# Altium PCB PCB1.PcbDoc (part 1 of 2)
Units mm, origin at the board's own origin, x right, y up, seen from the top; angles counter-clockwise.
Board outline 53.34 x 94.59 mm, 4 copper layers (Top Layer, Signal Layer 1, Signal Layer 2, Bottom Layer), stack 0.778 mm thick; 130 components, 127 nets, 591 pads, 299 vias.
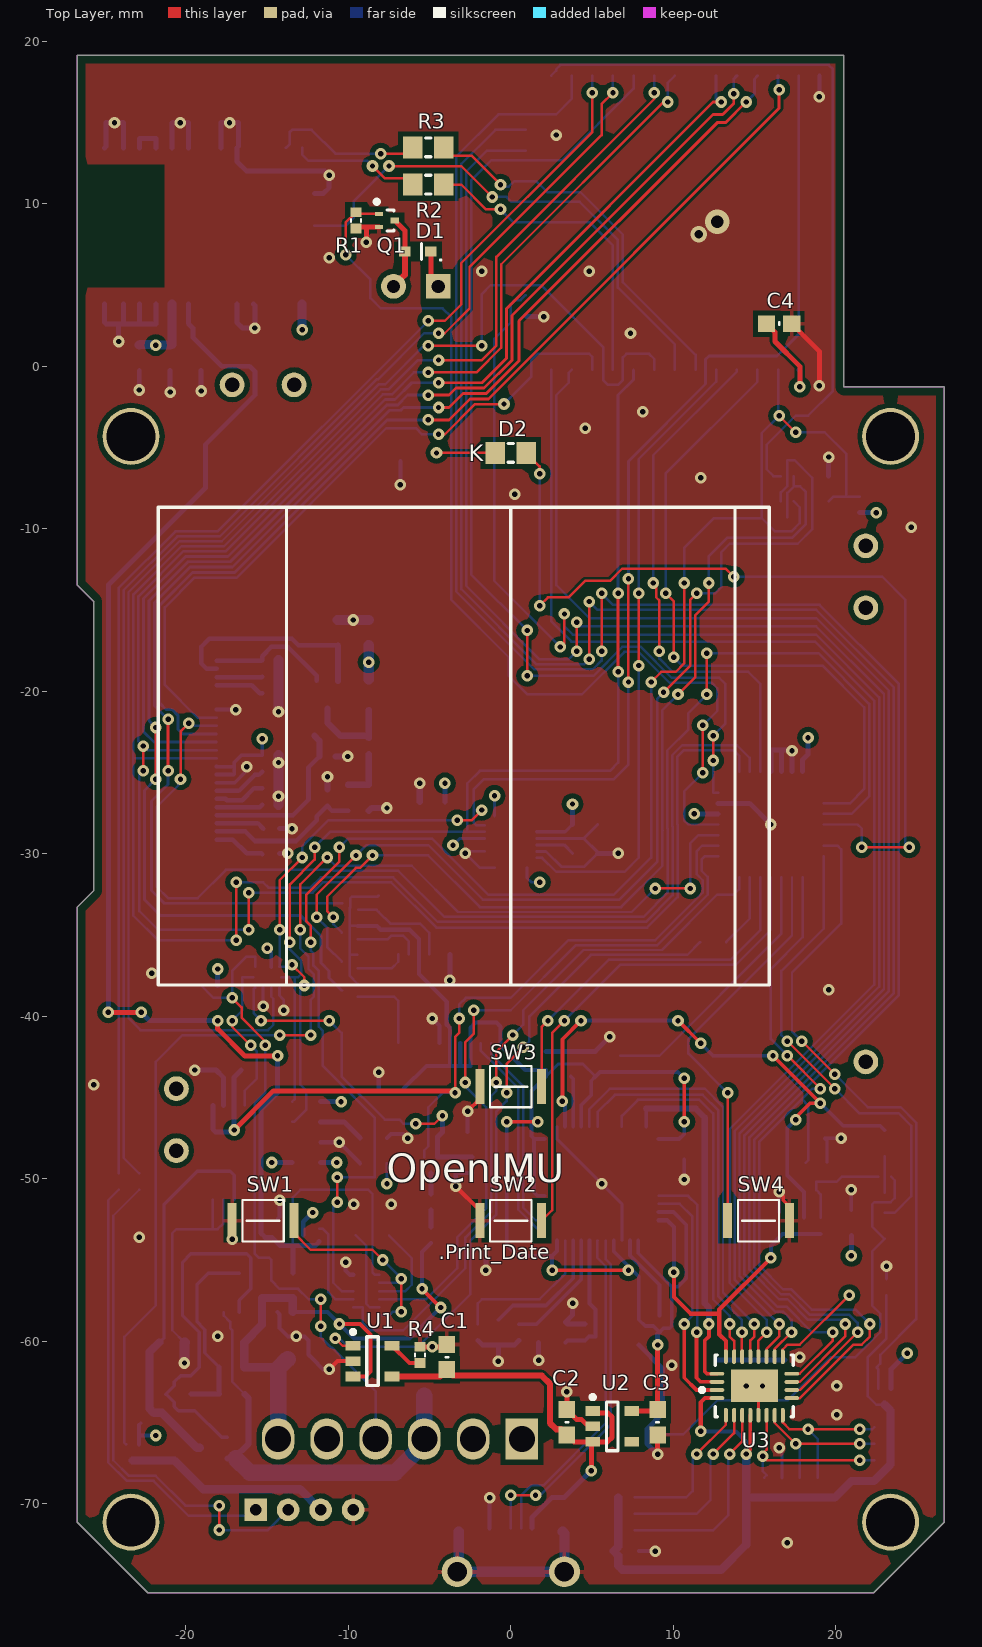
[diagram p0: Top Layer view]
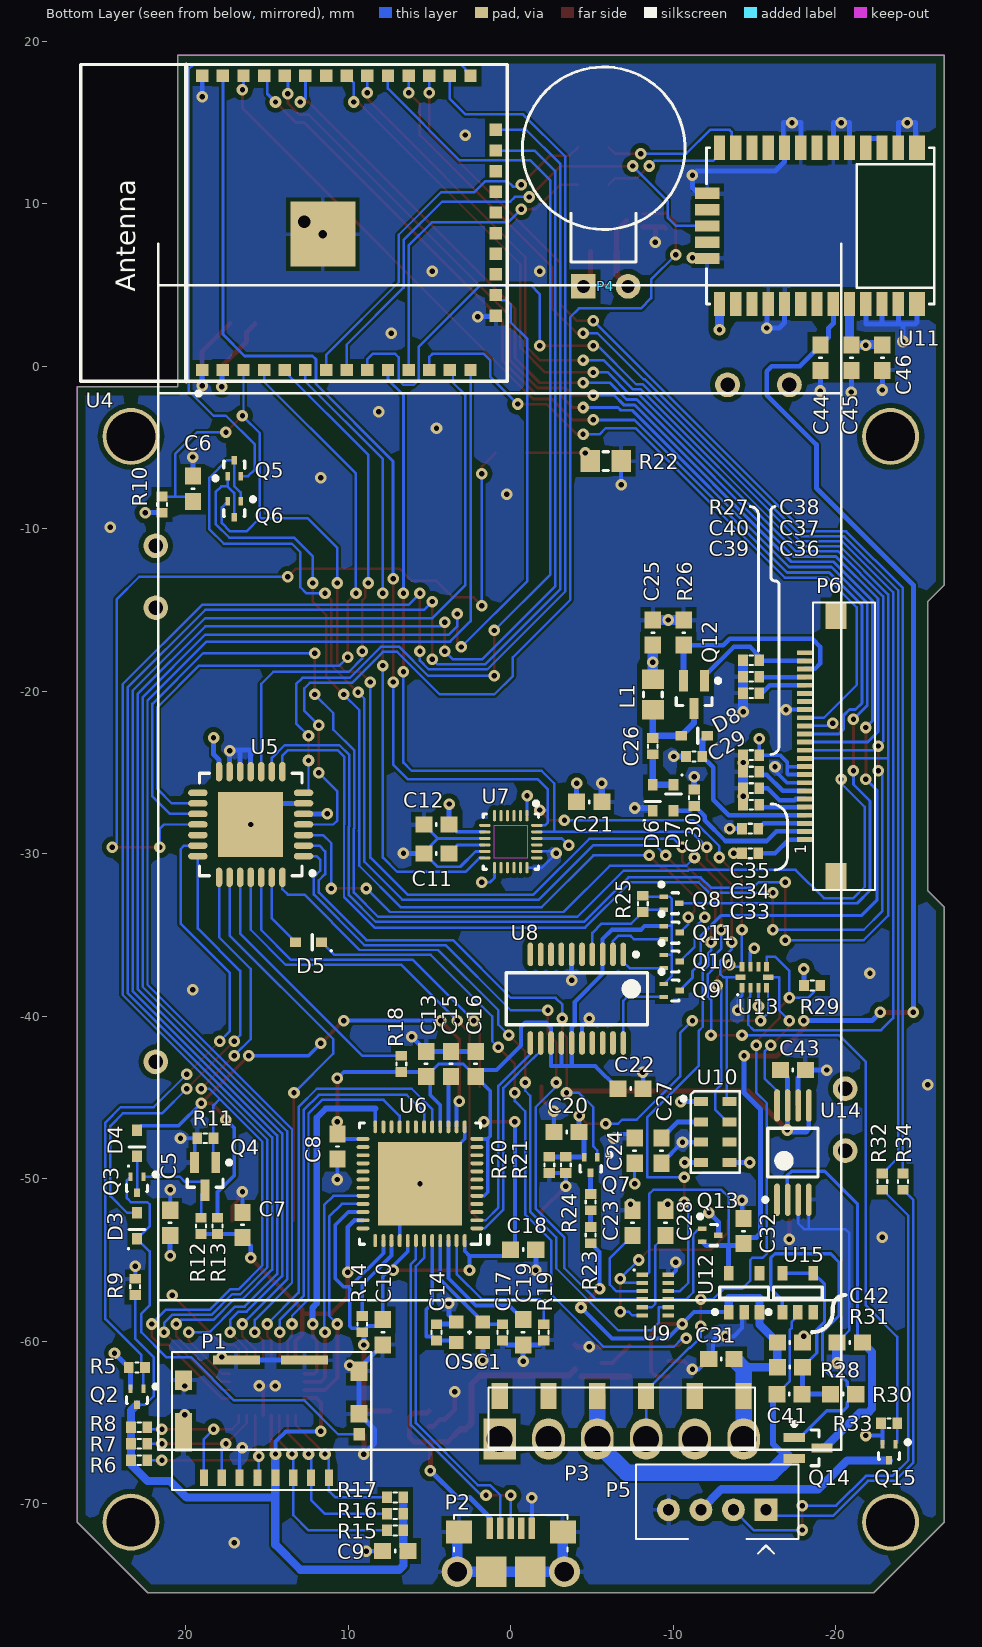
[diagram p1: Bottom Layer view, seen from below]
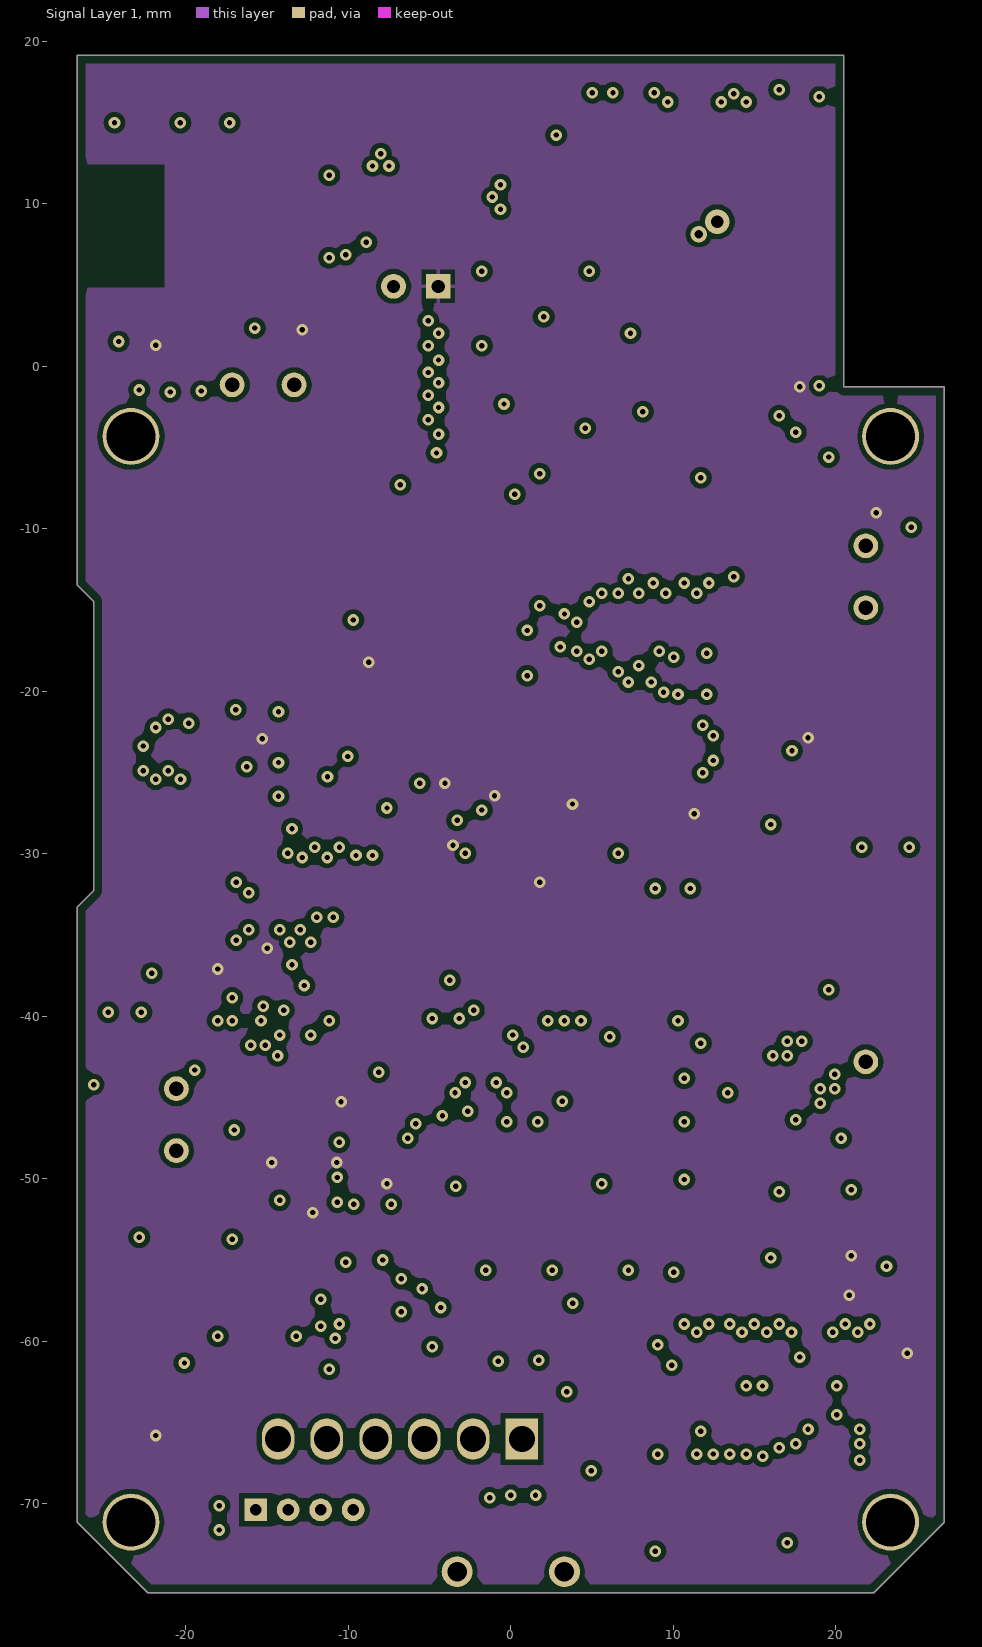
[diagram p2: Signal Layer 1]
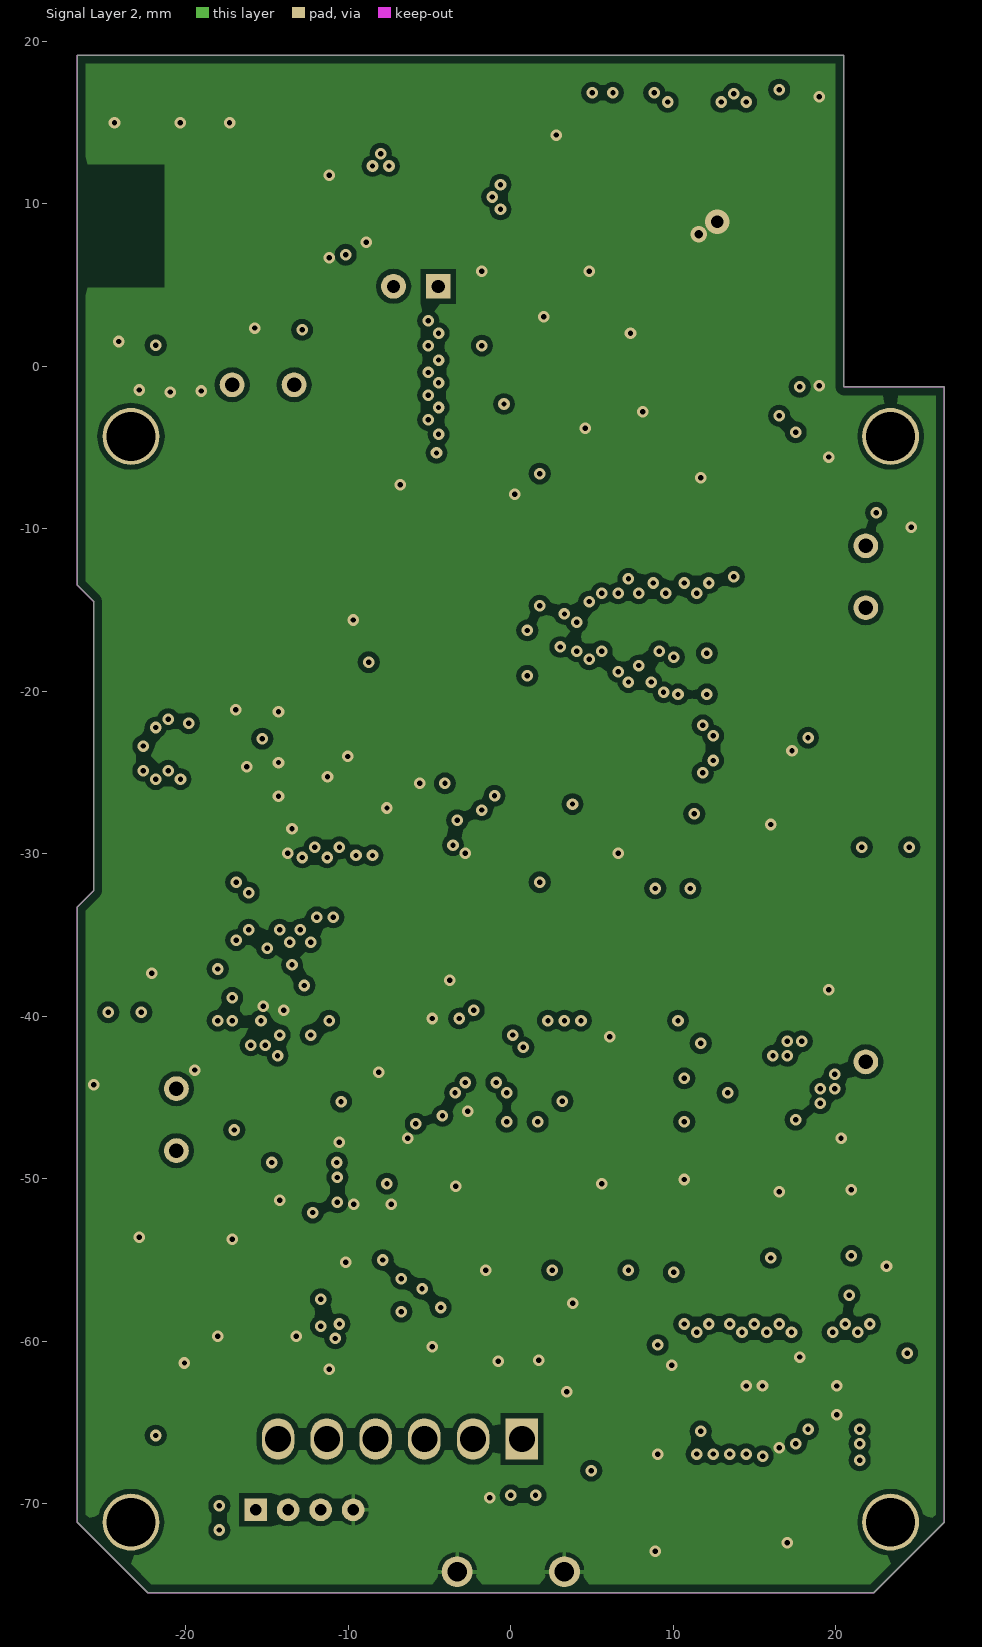
[diagram p3: Signal Layer 2]

## Layer stack, top to bottom
Top Solder: solder mask 0.0102, Solder Resist, Dk 3.5
Top Layer: signal copper 0.0356
Dielectric 1: core 0.254, FR-4, Dk 4.2
Signal Layer 1: signal copper 0.036
Dielectric 3: prepreg 0.127, Dk 4.2
Signal Layer 2: signal copper 0.036
Dielectric 2: core 0.254, Dk 4.2
Bottom Layer: signal copper 0.0356
Bottom Solder: solder mask 0.0102, Solder Resist, Dk 3.5

## Board outline
-26.67,-71.12 -26.67,-33.274 -25.654,-32.258 -25.654,-14.478 -26.67,-13.462 -26.67,19.13 20.494,19.13 20.494,-1.27 26.67,-1.27 26.67,-71.12 22.332,-75.458 -22.332,-75.458

## Design rules (kind name [scope] priority, off if disabled: settings)
Clearance Clearance_1 [InPoly vs OnLayer('Keep-Out Layer')] p1: gap=0.508
Clearance [All] p2: gap=0.152 except(0.305: SMDPad-Poly THPad-Poly Via-Poly Poly-Poly)
PolygonConnect PolygonConnect_1 [IsVia] p1: connectstyle=Direct reliefconductorwidth=0.254 reliefentries=4 polygonreliefangle="90 Angle" airgapwidth=0.254
PolygonConnect [All] p2: connectstyle=Relief reliefconductorwidth=0.254 reliefentries=4 polygonreliefangle="90 Angle" airgapwidth=0.254
RoomDefinition TopLevel [InComponentClass('TopLevel')] p1: confinementstyle=ConfineIn formatcopy=TRUE lockcomponents=FALSE outline 27.795,-78.525 31.195,-78.525 31.195,-74.525 27.795,-74.525
RoomDefinition USB_SD [InComponentClass('USB_SD')] p2: confinementstyle=ConfineIn formatcopy=TRUE lockcomponents=FALSE outline 117.438,31.528 269.076,31.528 269.076,45.117 117.438,45.117
RoomDefinition Sensors [InComponentClass('Sensors')] p3: confinementstyle=ConfineIn formatcopy=TRUE lockcomponents=FALSE outline 117.438,11.462 309.97,11.462 309.97,30.258 117.438,30.258
RoomDefinition SD_Share [InComponentClass('SD_Share')] p4: confinementstyle=ConfineIn formatcopy=TRUE lockcomponents=FALSE outline 117.438,-9.112 249.391,-9.112 249.391,10.192 117.438,10.192
RoomDefinition Power [InComponentClass('Power')] p5: confinementstyle=ConfineIn formatcopy=TRUE lockcomponents=FALSE outline 117.438,-30.321 298.032,-30.321 298.032,-10.255 117.438,-10.255
RoomDefinition MCU [InComponentClass('MCU')] p6: confinementstyle=ConfineIn formatcopy=TRUE lockcomponents=FALSE outline 117.438,-58.515 266.028,-58.515 266.028,-29.051 117.438,-29.051
RoomDefinition Display [InComponentClass('Display')] p7: confinementstyle=ConfineIn formatcopy=TRUE lockcomponents=FALSE outline 117.438,-80.232 213.704,-80.232 213.704,-59.658 117.438,-59.658
RoomDefinition ADC [InComponentClass('ADC')] p8: confinementstyle=ConfineIn formatcopy=TRUE lockcomponents=FALSE outline 117.438,-86.328 139.79,-86.328 139.79,-78.962 117.438,-78.962
RoutingVias [All] p1: holewidth=0.33 width=0.711 viastyle="Through Hole" minholewidth=0.33 minwidth=0.711 maxholewidth=0.711 maxwidth=1.27
SolderMaskExpansion [All] p1: expansion=0.102
Width [All] p1: maxlimit=1.27 minlimit=0.152 preferedwidth=0.254 midlayer1_maxwidth=0.254 midlayer2_maxwidth=0.254 minimp=50.000000 maximp=50.000000 favimp=50.000000
30 further rules are at their usual default settings.

## Classes and differential pairs
component class TopLevel: R18
component class ADC: U13
component class Display: C25 C26 C29 C30 C33 C34 C35 C36 C37 C38 C39 C40 D6 D7 D8 L1 P6 Q12 R26 R27
component class MCU: C4 C6 C22 Q5 Q6 Q8 Q9 Q10 Q11 R10 R25 U4 U5 U8
component class Power: C1 C20 C23 C28 C31 C32 C41 C42 C43 D5 P3 Q7 Q13 Q14 R4 R20 R21 R23 R24 R28 R29 R30 R31 SW1 U1 U9 U12 U14 U15
component class SD_Share: C5 C7 C9 D3 D4 P1 Q2 Q3 Q4 R5 R6 R7 R8 R9 R11 R12 R13 R15 R16 R17 U3
component class Sensors: C11 C12 C21 C24 C27 C44 C45 C46 D1 D2 P4 P5 Q1 Q15 R1 R2 R3 R22 R32 R33 R34 SW2 SW3 SW4 U7 U10 U11
component class USB_SD: C2 C3 C8 C10 C13 C14 C15 C16 C17 C18 C19 OSC1 P2 R14 R19 U2 U6

## Components (designator, comment, footprint, x,y, rotation, side; value= is the part's Value field where it differs from the comment)
C1 "Capacitor" 0603 -3.937,-60.96 r270 top (schematic designator C26)
C2 "Capacitor" 0603 3.448,-64.97 r90 top (schematic designator C38)
C3 "Capacitor" 0603 9.036,-64.97 r270 top (schematic designator C39)
C4 "Capacitor" 0603 16.51,2.62 r180 top (schematic designator C17)
C5 "Capacitor" 0603 20.955,-52.705 r90 bottom (schematic designator C30)
C6 "Capacitor" 0603 19.558,-7.54 r90 bottom (schematic designator C18)
C7 "Capacitor" 0603 16.51,-52.832 r90 bottom (schematic designator C28)
C8 "Capacitor" 0603 10.668,-48.006 r270 bottom (schematic designator C43)
C9 "Capacitor" 0603 7.112,-72.898 r0 bottom (schematic designator C29)
C10 "Capacitor" 0603 7.874,-59.436 r270 bottom (schematic designator C41)
C11 "Capacitor" 0603 4.572,-29.972 r0 bottom (schematic designator C31)
C12 "Capacitor" 0603 4.572,-28.194 r0 bottom (schematic designator C32)
C13 "Capacitor" 0603 5.207,-42.926 r90 bottom (schematic designator C48)
C14 "Capacitor" 0402 4.572,-59.436 r90 bottom (schematic designator C40)
C15 "Capacitor" 0603 3.683,-42.926 r90 bottom (schematic designator C46)
C16 "Capacitor" 0603 2.159,-42.926 r90 bottom (schematic designator C44)
C17 "Capacitor" 0402 0.508,-59.436 r90 bottom (schematic designator C45)
C18 "Capacitor" 0603 -0.762,-54.356 r180 bottom (schematic designator C42)
C19 "Capacitor" 0603 -0.762,-59.436 r270 bottom (schematic designator C47)
C20 "Capacitor" 0603 -3.429,-47.117 r180 bottom (schematic designator C23)
C21 "Capacitor" 0603 -4.826,-26.797 r180 bottom (schematic designator C33)
C22 "Capacitor" 0603 -7.366,-44.45 r0 bottom (schematic designator C16)
C23 "Capacitor" 0603 -7.493,-52.705 r270 bottom (schematic designator C2)
C24 "Capacitor" 0603 -7.62,-48.26 r90 bottom (schematic designator C34)
C25 "Capacitor" 0603 -8.737,-16.389 r270 bottom (schematic designator C14)
C26 "Capacitor" 0402 -8.737,-23.374 r270 bottom (schematic designator C4)
C27 "Capacitor" 0603 -9.271,-48.26 r270 bottom (schematic designator C1)
C28 "Capacitor" 0603 -9.525,-52.705 r270 bottom (schematic designator C50)
C29 "Capacitor" 0402 -11.277,-24.009 r180 bottom (schematic designator C10)
C30 "Capacitor" 0402 -11.277,-26.549 r270 bottom (schematic designator C12)
C31 "Capacitor" 0603 -12.954,-61.087 r180 bottom (schematic designator C27)
C32 "Capacitor" 0603 -14.31,-53.208 r270 bottom (schematic designator C25)
C33 "Capacitor" 0402 -14.732,-29.972 r180 bottom (schematic designator C13)
C34 "Capacitor" 0402 -14.732,-28.448 r180 bottom (schematic designator C11)
C35 "Capacitor" 0402 -14.792,-26.974 r180 bottom (schematic designator C9)
C36 "Capacitor" 0402 -14.792,-25.958 r180 bottom (schematic designator C8)
C37 "Capacitor" 0402 -14.792,-24.942 r180 bottom (schematic designator C7)
C38 "Capacitor" 0402 -14.792,-23.926 r180 bottom (schematic designator C49)
C39 "Capacitor" 0402 -14.792,-20.116 r180 bottom (schematic designator C6)
C40 "Capacitor" 0402 -14.792,-19.1 r180 bottom (schematic designator C5)
C41 "Capacitor" 0603 -17.145,-63.246 r180 bottom (schematic designator C21)
C42 "Capacitor" 0603 -17.173,-60.06 r0 bottom (schematic designator C24)
C43 "Capacitor" 0603 -17.358,-43.302 r0 bottom (schematic designator C22)
C44 "Capacitor" 0603 -19.05,0.525 r270 bottom (schematic designator C37)
C45 "Capacitor" 0603 -20.955,0.525 r270 bottom (schematic designator C35)
C46 "Capacitor" 0603 -22.86,0.525 r270 bottom (schematic designator C36)
D1 "Diode" DIODE_SOD523 -5.715,7.065 r180 top (schematic designator D9)
D2 "Diode_LED" 0805_LED 0,-5.334 r0 top (schematic designator D8)
D3 "Diode" DIODE_SOD523 22.995,-52.892 r90 bottom (schematic designator D6)
D4 "Diode" DIODE_SOD523 22.995,-47.812 r90 bottom (schematic designator D5)
D5 "Diode" DIODE_SOD523 12.446,-35.433 r0 bottom (schematic designator D10)
D6 "Diode" DIODE_SOD523 -8.737,-26.549 r90 bottom (schematic designator D2)
D7 "Diode" DIODE_SOD523 -10.007,-26.549 r270 bottom (schematic designator D1)
D8 "Diode" DIODE_SOD523 -11.277,-22.739 r0 bottom (schematic designator D3)
L1 "Inductor" 0805 -8.737,-20.199 r270 bottom
OSC1 "Crystal_4" XTAL_ABM10 2.54,-59.436 r0 bottom (schematic designator OSC2)
P1 "CON_uSD_1051620001" CONN_uSD_MOLEX_1051620001 14.732,-64.77 r180 bottom (schematic designator P4)
P2 "USB_MICROB" USB_MICROB 0,-74.168 r180 bottom (schematic designator P6)
P3 "CON6_FBIS2" CONN6_FBIS2_V -6.82,-64.68 r180 bottom locked (schematic designator P2)
P4 "MOTOR_VIBRATION_316040004" MOTOR_VIBRATION_316040004 -5.715,13.415 r180 bottom (schematic designator P7)
P5 "CON4" CONN_JSTPH_4_TH_RA -12.7,-70.358 r180 bottom
P6 "CON24_ALT" CONN24_FFC_687124183622 -18.602,-23.374 r90 bottom (schematic designator P1)
Q1 "MOSFET_N_GDS" SOT723 -7.62,8.97 r0 top (schematic designator Q19)
Q2 "MOSFET_P_GDS" SOT723 23,-63.4 r270 bottom (schematic designator Q14)
Q3 "MOSFET_N_GDS" SOT723 22.995,-50.352 r270 bottom (schematic designator Q15)
Q4 "MOSFET_N_GDS" SC70_GDS 18.804,-49.844 r270 bottom (schematic designator Q16)
Q5 "MOSFET_N_GDS" SOT723 17.018,-6.27 r90 bottom
Q6 "MOSFET_N_GDS" SOT723 17.018,-8.81 r270 bottom (schematic designator Q2)
Q7 "MOSFET_N_GDS" SOT723 -4.912,-49.144 r270 bottom (schematic designator Q8)
Q8 "MOSFET_N_GDS" SOT723 -9.888,-33.039 r180 bottom (schematic designator Q4)
Q9 "MOSFET_N_GDS" SOT723 -9.906,-38.405 r180 bottom (schematic designator Q3)
Q10 "MOSFET_N_GDS" SOT723 -9.906,-36.627 r180 bottom (schematic designator Q7)
Q11 "MOSFET_N_GDS" SOT723 -9.906,-34.849 r180 bottom (schematic designator Q6)
Q12 "MOSFET_N_GDS" SC70_GDS -11.277,-20.199 r270 bottom (schematic designator Q1)
Q13 "MOSFET_P_GDS" SOT723 -12.278,-53.462 r180 bottom (schematic designator Q10)
Q14 "MOSFET_N_GDS" SC70_GDS -18.288,-66.548 r180 bottom (schematic designator Q9)
Q15 "MOSFET_P_GDS" SOT723 -23.271,-66.828 r270 bottom (schematic designator Q18)
R1 "Resistor" 0402 -9.525,8.97 r270 top (schematic designator R51)
R2 "Resistor" 0805 -5.08,11.176 r180 top (schematic designator R37)
R3 "Resistor" 0805 -5.08,13.462 r180 top (schematic designator R38)
R4 "Resistor" 0402 -5.588,-60.833 r90 top (schematic designator R21)
R5 "Resistor" 0402 23,-61.6 r180 bottom (schematic designator R30)
R6 "Resistor" 0402 22.86,-67.31 r180 bottom (schematic designator R25)
R7 "Resistor" 0402 22.86,-66.294 r180 bottom (schematic designator R26)
R8 "Resistor" 0402 22.86,-65.278 r180 bottom (schematic designator R27)
R9 "Resistor" 0402 23.114,-56.642 r270 bottom (schematic designator R22)
R10 "Resistor" 0402 21.463,-8.509 r90 bottom (schematic designator R7)
R11 "Resistor" 0402 18.796,-47.498 r180 bottom (schematic designator R23)
R12 "Resistor" 0402 19.058,-52.892 r90 bottom (schematic designator R31)
R13 "Resistor" 0402 18.042,-52.892 r90 bottom (schematic designator R32)
R14 "Resistor" 0402 9.144,-58.928 r90 bottom (schematic designator R47)
R15 "Resistor" 0402 7.112,-71.628 r0 bottom (schematic designator R24)
R16 "Resistor" 0402 7.112,-70.612 r0 bottom (schematic designator R29)
R17 "Resistor" 0402 7.112,-69.596 r0 bottom (schematic designator R28)
R18 "Resistor" 0402 6.731,-42.926 r270 bottom (schematic designator R2)
R19 "Resistor" 0402 -2.032,-59.436 r270 bottom (schematic designator R49)
R20 "Resistor" 0402 -2.372,-49.144 r90 bottom (schematic designator R14)
R21 "Resistor" 0402 -3.388,-49.144 r90 bottom (schematic designator R15)
R22 "Resistor" 0805 -5.842,-5.842 r0 bottom (schematic designator R34)
R23 "Resistor" 0402 -4.912,-53.454 r270 bottom (schematic designator R11)
R24 "Resistor" 0402 -4.912,-51.422 r270 bottom (schematic designator R12)
R25 "Resistor" 0402 -8.128,-33.071 r270 bottom (schematic designator R8)
R26 "Resistor" 0603 -10.642,-16.389 r90 bottom (schematic designator R4)
R27 "Resistor" 0402 -14.792,-18.084 r0 bottom (schematic designator R3)
R28 "Resistor" 0603 -17.173,-61.584 r180 bottom (schematic designator R9)
R29 "Resistor" 0402 -18.542,-38.1 r0 bottom (schematic designator R13)
R30 "Resistor" 0603 -20.447,-63.246 r180 bottom (schematic designator R10)
R31 "Resistor" 0603 -20.854,-60.06 r0 bottom (schematic designator R16)
R32 "Resistor" 0402 -22.86,-50.165 r90 bottom (schematic designator R53)
R33 "Resistor" 0402 -23.271,-65.028 r0 bottom (schematic designator R35)
R34 "Resistor" 0402 -24.13,-50.165 r90 bottom (schematic designator R39)
SW1 "Button_2pins" BUTTON_EVP-AW -15.24,-52.57 r0 top
SW2 "Button_2pins" BUTTON_EVP-AW 0,-52.57 r180 top (schematic designator SW3)
SW3 "Button_2pins" BUTTON_EVP-AW 0,-44.323 r180 top (schematic designator SW4)
SW4 "Button_2pins" BUTTON_EVP-AW 15.24,-52.57 r0 top (schematic designator SW2)
U1 "MCP73831T-2ACI/OT" SOT23_5 -8.509,-61.214 r0 top (schematic designator U8)
U2 "AP2112K-3.3TRG1" SOT23_5 6.242,-65.224 r0 top (schematic designator U14)
U3 "FSSD07BQX" MLP24 14.986,-62.738 r90 top (schematic designator U9)
U4 "ESP-WROOM-32" ESP-WROOM-32 13.716,8.822 r90 bottom (schematic designator U3)
U5 "MCP23S17-E/ML" QFN28-S 16.002,-28.194 r0 bottom (schematic designator U2)
U6 "USB2640-HZH-02" QFN48 5.588,-50.292 r180 bottom (schematic designator U15)
U7 "MPU-9250" QFN24-0.4mm-NOPAD 0,-29.25 r270 bottom locked (schematic designator U10)
U8 "FT231XS-R" SSOP20 -4.064,-38.913 r270 bottom (schematic designator U4)
U9 "STM6600DA55DM6F" DFN12-0.5mm -8.89,-57.15 r180 bottom (schematic designator U16)
U10 "MPL115A2T1" MPL115A2T1 -12.573,-47.117 r180 bottom (schematic designator U11)
U11 "CAM-M8Q" CAM-M8 -18.542,8.632 r270 bottom (schematic designator U12)
U12 "AP2112K-3.3TRG1" SOT23_5 -14.358,-56.996 r90 bottom (schematic designator U7)
U13 "ADS1015IRUGR" ADS1018IRUGR -14.986,-37.592 r90 bottom (schematic designator U1)
U14 "INA240" TSSOP8 -17.358,-48.382 r90 bottom (schematic designator U6)
U15 "MIC2774N-29YM5-TR" SOT23_5 -17.66,-56.996 r90 bottom (schematic designator U5)

## Footprints (in the part's own frame and the unit in brackets; to place one, negate y for a bottom-side part, rotate by r counter-clockwise, add the part's x,y. Pads: shape width x height; smd on the part's side, far side on the other; paste and mask are expansions set on the pad)
0402 [mm] "Chip Resistor, 2-Leads, Body 1,0x0,5mm, IPC Medium Density"
  rect 0.6x0.7 smd mask+0.04: 1(-0.5,0) 2(0.5,0)
  silkscreen extent -0.1,-0.3 0.1,0.3, body extent -0.55,-0.27 0.55,0.28, height 0.4
0603 [mm] "Chip Resistor, 2-Leads, Body 1,5x0,8mm, IPC Medium Density"
  rect 1.05x1 smd: 1(-0.775,0) 2(0.775,0)
  silkscreen extent 0,-0.08 0,0.08, body extent -0.85,-0.48 0.85,0.47, height 0.55
0805 [mm] "Chip Resistor, 2-Leads, Body 2,0x1,3mm, IPC Medium Density"
  rect 1.2x1.35 smd: 1(-0.95,0) 2(0.95,0)
  silkscreen extent -0.15,-0.58 0.15,0.58, body extent -1.1,-0.67 1.1,0.67, height 0.65
0805_LED [mm] "Chip Resistor, 2-Leads, Body 2,0x1,3mm, IPC Medium Density"
  rect 1.2x1.35 smd: A(0.95,0) K(-0.95,0)
  silkscreen extent -0.15,-0.58 0.15,0.58, body extent -1.1,-0.67 1.1,0.67, height 0.65
ADS1018IRUGR [mm] "DFN10, 4pins (height), 1pin (width), 2*1.5mm"
  rect 0.58x0.3 smd mask+0.04: 1(-0.635,0.75) 4(-0.635,-0.75) 6(0.635,-0.75) 9(0.635,0.75)
  rect 0.58x0.25 smd mask+0.04: 2(-0.635,0.25) 3(-0.635,-0.25) 7(0.635,-0.25) 8(0.635,0.25)
  rect 0.35x0.63 smd mask+0.04: 5(0,-0.86) 10(0,0.86)
  silkscreen extent -1.12,0.98 -1.03,1.07, body extent -0.77,-1.03 0.77,1.02, height 0.4
BUTTON_EVP-AW [mm] "EVP-AWBD2A SMT Vertical low height"
  rect 0.55x2.15 smd mask+0.12: 1(-1.9,0) 2(1.9,0)
  silkscreen extent -1.27,-1.27 1.27,1.27, body extent -1.75,-1.1 1.75,1.1, height 0.56
CAM-M8 [mm] "u-blox CAM GNSS antenna module"
  rect 1.5x0.7 smd: 1(4.8,-5.7) 2(4.8,-4.7) 3(4.8,-3.7) 4(4.8,-2.7) 5(4.8,-1.7) 6(4.8,-0.7) 7(4.8,0.3) 8(4.8,1.3) 9(4.8,2.3) 10(4.8,3.3) 11(4.8,4.3) 12(4.8,5.3) 15(-4.8,5.3) 16(-4.8,4.3) 17(-4.8,3.3) 18(-4.8,2.3) 19(-4.8,1.3) 20(-4.8,0.3) 21(-4.8,-0.7) 22(-4.8,-1.7) 23(-4.8,-2.7) 24(-4.8,-3.7) 25(-4.8,-4.7) 26(-4.8,-5.7)
  rect 1.5x1 smd: 13(4.8,6.45) 14(-4.8,6.45)
  rect 0.7x1.5 smd: 27(-2,-6.45) 28(-1,-6.45) 29(0,-6.45) 30(1,-6.45) 31(2,-6.45)
  Multi-Layer pour cut-out: -3.8,7.5 -3.8,2.75 3.8,2.75 3.8,7.5
  silkscreen extent -4.8,-6.5 4.8,7.5, body extent -4.8,-6.5 4.8,7.5, height 1.97
CONN6_FBIS2_V [mm] "TE 1932870-2"
  oval 2x2.54 hole 1.6 mask+0.12: 1(7.5,-1.325) 2(4.5,-1.325) 3(1.5,-1.325) 4(-1.5,-1.325) 5(-4.5,-1.325)
  rect 1x1.6 smd mask+0.12: 1(7.5,1.325) 2(4.5,1.325) 3(1.5,1.325) 4(-1.5,1.325) 5(-4.5,1.325) 6(-7.5,1.325)
  rect 2x2.54 hole 1.6 mask+0.12: 6(-7.5,-1.325)
  silkscreen extent -8.2,-1.85 8.2,1.85, body extent -8.2,-2.75 8.2,1.94, height 4.62
CONN24_FFC_687124183622 [mm] "0.5mm pitch 687124183622"
  rect 0.3x1 smd mask+0.05: 1(-5.75,0.5) 2(-5.25,0.5) 3(-4.75,0.5) 4(-4.25,0.5) 5(-3.75,0.5) 6(-3.25,0.5) 7(-2.75,0.5) 8(-2.25,0.5) 9(-1.75,0.5) 10(-1.25,0.5) 11(-0.75,0.5) 12(-0.25,0.5) 13(0.25,0.5) 14(0.75,0.5) 15(1.25,0.5) 16(1.75,0.5) 17(2.25,0.5) 18(2.75,0.5) 19(3.25,0.5) 20(3.75,0.5) 21(4.25,0.5) 22(4.75,0.5) 23(5.25,0.5) 24(5.75,0.5)
  rect 1.65x1.3 smd paste+0 mask+0.025: M(-8.025,-1.4) M(8.025,-1.4)
  silkscreen extent -8.85,-3.8 8.85,0, body extent -8.85,-3.63 8.85,0.62, height 1.28
CONN_JSTPH_4_TH_RA [mm] "Right-angle, TH JST-PH connector"
  rect 1.397x1.397 hole 0.7 mask+0.12: 1(3,0)
  round 1.397 hole 0.7 mask+0.12: 2(1,0) 3(-1,0) 4(-3,0)
  silkscreen extent -5,-2.7 5,2.8, body extent -4.95,-6.35 4.95,1.25, height 5.15
CONN_uSD_MOLEX_1051620001 [mm] "MicroSD card Molex 1051620001"
  rect 0.5x1 smd: 1(3.545,-3.618) 2(2.445,-3.618) 3(1.345,-3.618) 4(0.245,-3.618) 5(-0.855,-3.618) 6(-1.955,-3.618) 7(-3.055,-3.618) 8(-4.155,-3.618)
  rect 0.72x0.78 smd: 9(5.405,-0.937)
  rect 1.05x1.08 smd: G1(5.395,0.333)
  rect 1.05x1.2 smd: G2(5.395,2.943) G3(-5.405,2.372)
  rect 1.05x2.39 smd: G4(-5.405,-0.813)
  rect 2.91x0.55 smd: M(-2.15,3.618) M(2.04,3.618)
  silkscreen extent -6.1,-4.37 6.15,4.13, body extent -5.65,-12.12 6.14,3.66, height 1.5
DFN12-0.5mm [mm] "DFN12 0.5mm-pitch (STM6600)"
  rect 0.711x0.254 smd mask+0.02: 1(-0.8,1.25) 2(-0.8,0.75) 3(-0.8,0.25) 4(-0.8,-0.25) 5(-0.8,-0.75) 6(-0.8,-1.25) 7(0.8,-1.25) 8(0.8,-0.75) 9(0.8,-0.25) 10(0.8,0.25) 11(0.8,0.75) 12(0.8,1.25)
  silkscreen extent -1.35,1.5 -1.25,1.6, body extent -1,-1.5 1,1.5, height 0.8
DIODE_SOD523 [mm] "Per NXP footprint recommendation (reflow soldering)"
  rect 0.7x0.6 smd paste-0.05: A(0.8,0) K(-0.8,0)
  silkscreen extent -1.45,-0.48 -0.23,0.57, body extent -0.65,-0.43 0.65,0.43, height 0.77
ESP-WROOM-32 [mm] "ESP-WROOM-32 module"
  rect 0.762x0.762 smd: 1(-9.05,5.27) 2(-9.05,4) 3(-9.05,2.73) 4(-9.05,1.46) 5(-9.05,0.19) 6(-9.05,-1.08) 7(-9.05,-2.35) 8(-9.05,-3.62) 9(-9.05,-4.89) 10(-9.05,-6.16) 11(-9.05,-7.43) 12(-9.05,-8.7) 13(-9.05,-9.97) 14(-9.05,-11.24) 15(-5.71,-12.8) 16(-4.44,-12.8) 17(-3.17,-12.8) 18(-1.9,-12.8) 19(-0.63,-12.8) 20(0.64,-12.8) 21(1.91,-12.8) 22(3.18,-12.8) 23(4.45,-12.8) 24(5.72,-12.8) 25(9.05,-11.24) 26(9.05,-9.97) 27(9.05,-8.7) 28(9.05,-7.43) 29(9.05,-6.16) 30(9.05,-4.89) 31(9.05,-3.62) 32(9.05,-2.35) 33(9.05,-1.08) 34(9.05,0.19) 35(9.05,1.46) 36(9.05,2.73) 37(9.05,4) 38(9.05,5.27)
  rect 4x4 smd: PAD(-0.7,-2.15)
  silkscreen extent -10.62,-13.5 9.75,12.75, body extent -9.04,-12.75 9.03,12.79, height 3
MLP24 [mm] "0.5mm pitch; for FSSD07"
  oval 0.24x0.9 smd mask+0.05: 1(-0.25,2.3) 2(-0.75,2.3) 11(-0.75,-2.3) 12(-0.25,-2.3) 13(0.25,-2.3) 14(0.75,-2.3) 23(0.75,2.3) 24(0.25,2.3)
  oval 0.9x0.24 smd mask+0.05: 3(-1.8,1.75) 4(-1.8,1.25) 5(-1.8,0.75) 6(-1.8,0.25) 7(-1.8,-0.25) 8(-1.8,-0.75) 9(-1.8,-1.25) 10(-1.8,-1.75) 15(1.8,-1.75) 16(1.8,-1.25) 17(1.8,-0.75) 18(1.8,-0.25) 19(1.8,0.25) 20(1.8,0.75) 21(1.8,1.25) 22(1.8,1.75)
  rect 2x2.9 smd mask+0.05: PAD(0,0)
  silkscreen extent -1.9,-2.4 1.9,3.35, body extent -1.75,-2.25 1.75,2.25, height 0.5
MOTOR_VIBRATION_316040004 [mil] "316040004, 10-mm diameter, 3-mm thickness"
  rect 60x60 hole 32 mask+4.72: 1(-49.21,-334.65)
  round 60 hole 32 mask+4.72: 2(59.06,-334.65)
  silkscreen extent -197,-276 197,197, body extent -197,-276 197,197, height 120
MPL115A2T1 [mm] "MPL115A2T1 barometer, 8-LGA"
  rect 0.875x0.55 smd: 1(-0.875,1.875) 2(-0.875,0.625) 3(-0.875,-0.625) 4(-0.875,-1.875) 5(0.875,-1.875) 6(0.875,-0.625) 7(0.875,0.625) 8(0.875,1.875)
  silkscreen extent -2.08,-2.5 1.5,2.5, body extent -1.5,-2.5 1.5,2.5, height 1.2
QFN24-0.4mm-NOPAD [mm] "For MPU9250"
  oval 0.7x0.2 smd mask+0.04: 1(-1.6,1) 2(-1.6,0.6) 3(-1.6,0.2) 4(-1.6,-0.2) 5(-1.6,-0.6) 6(-1.6,-1) 13(1.6,-1) 14(1.6,-0.6) 15(1.6,-0.2) 16(1.6,0.2) 17(1.6,0.6) 18(1.6,1)
  oval 0.2x0.7 smd mask+0.04: 7(-1,-1.6) 8(-0.6,-1.6) 9(-0.2,-1.6) 10(0.2,-1.6) 11(0.6,-1.6) 12(1,-1.6) 19(1,1.6) 20(0.6,1.6) 21(0.2,1.6) 22(-0.2,1.6) 23(-0.6,1.6) 24(-1,1.6)
  Top Layer keep-out region: -1.016,1.016 1.016,1.016 1.016,-1.016 -1.016,-1.016
  silkscreen extent -2.47,-1.7 1.7,1.7, body extent -1.55,-1.55 1.55,1.55, height 1.05
QFN28-S [mm] "0.65-mm pitch, Microchip PIC24HJ64GP202-I/MM"
  oval 1.2x0.4 smd mask+0.04: 1(-3.25,1.95) 2(-3.25,1.3) 3(-3.25,0.65) 4(-3.25,0) 5(-3.25,-0.65) 6(-3.25,-1.3) 7(-3.25,-1.95) 15(3.25,-1.95) 16(3.25,-1.3) 17(3.25,-0.65) 18(3.25,0) 19(3.25,0.65) 20(3.25,1.3) 21(3.25,1.95)
  oval 0.4x1.2 smd mask+0.04: 8(-1.95,-3.25) 9(-1.3,-3.25) 10(-0.65,-3.25) 11(0,-3.25) 12(0.65,-3.25) 13(1.3,-3.25) 14(1.95,-3.25) 22(1.95,3.25) 23(1.3,3.25) 24(0.65,3.25) 25(0,3.25) 26(-0.65,3.25) 27(-1.3,3.25) 28(-1.95,3.25)
  rect 4x4 smd: PAD(0,0)
  silkscreen extent -3.92,-3.15 3.15,3.15, body extent -3,-3 3,3, height 1
QFN48 [mm] "QFN, 48-Leads, Body 7x7mm, Pitch 0.5mm, Thermal Pad 5.15X5.15mm, TI recommended"
  oval 0.8x0.24 smd mask+0.051: 1(3.5,-2.75) 2(3.5,-2.25) 3(3.5,-1.75) 4(3.5,-1.25) 5(3.5,-0.75) 6(3.5,-0.25) 7(3.5,0.25) 8(3.5,0.75) 9(3.5,1.25) 10(3.5,1.75) 11(3.5,2.25) 12(3.5,2.75) 25(-3.5,2.75) 26(-3.5,2.25) 27(-3.5,1.75) 28(-3.5,1.25) 29(-3.5,0.75) 30(-3.5,0.25) 31(-3.5,-0.25) 32(-3.5,-0.75) 33(-3.5,-1.25) 34(-3.5,-1.75) 35(-3.5,-2.25) 36(-3.5,-2.75)
  oval 0.24x0.8 smd mask+0.051: 13(2.75,3.5) 14(2.25,3.5) 15(1.75,3.5) 16(1.25,3.5) 17(0.75,3.5) 18(0.25,3.5) 19(-0.25,3.5) 20(-0.75,3.5) 21(-1.25,3.5) 22(-1.75,3.5) 23(-2.25,3.5) 24(-2.75,3.5) 37(-2.75,-3.5) 38(-2.25,-3.5) 39(-1.75,-3.5) 40(-1.25,-3.5) 41(-0.75,-3.5) 42(-0.25,-3.5) 43(0.25,-3.5) 44(0.75,-3.5) 45(1.25,-3.5) 46(1.75,-3.5) 47(2.25,-3.5) 48(2.75,-3.5)
  rect 5.15x5.15 smd paste-2.6: PAD(0,0)
  silkscreen extent -3.72,-3.72 4.2,3.72, body extent -3.57,-3.58 3.58,3.57, height 1.01
SC70_GDS [mm]
  rect 1.3x0.55 smd: D(0.85,0) G(-0.85,0.65) S(-0.85,-0.65)
  silkscreen extent -0.97,-1.1 0.67,1.6, body extent -0.67,-1.1 0.67,1.1, height 1.1
SOT23_5 [mm]
  rect 0.9x0.6 smd mask+0.07: 1(-1.2,0.95) 2(-1.2,0) 3(-1.2,-0.95) 4(1.2,-0.95) 5(1.2,0.95)
  silkscreen extent -1.32,-1.5 0.35,1.92, body extent -0.87,-1.5 0.87,1.5, height 1.45
SOT723 [mm] "ONSEMI CASE 631AA FOR DTC143Z-D"
  rect 0.52x0.36 smd: D(0.49,0)
  rect 0.52x0.27 smd: G(-0.49,0.4) S(-0.49,-0.4)
  silkscreen extent -0.75,-0.65 0.43,1.27, body extent -0.43,-0.63 0.43,0.63, height 0.55
SSOP20 [mm] "SOP, 20-Leads, Body 8.65x3.90mm, Pitch 0.64mm, IPC Medium Density, for FT231SX-R"
  oval 1.45x0.35 smd mask+0.04: 1(-2.725,2.858) 2(-2.725,2.223) 3(-2.725,1.588) 4(-2.725,0.953) 5(-2.725,0.318) 6(-2.725,-0.317) 7(-2.725,-0.952) 8(-2.725,-1.587) 9(-2.725,-2.222) 10(-2.725,-2.857) 11(2.725,-2.858) 12(2.725,-2.223) 13(2.725,-1.588) 14(2.725,-0.953) 15(2.725,-0.318) 16(2.725,0.317) 17(2.725,0.952) 18(2.725,1.587) 19(2.725,2.222) 20(2.725,2.857)
  silkscreen extent -2.85,-4.35 1.6,4.35, body extent -2,-4.35 2,4.35, height 1.76
TSSOP8 [mm] "TSOP, 8-Leads, Body 3x4.4mm, Pitch 0.65mm, IPC Low Density"
  oval 2x0.35 smd: 1(-2.9,0.975) 2(-2.9,0.325) 3(-2.9,-0.325) 4(-2.9,-0.975) 5(2.9,-0.975) 6(2.9,-0.325) 7(2.9,0.325) 8(2.9,0.975)
  silkscreen extent -3.02,-1.55 1.5,1.83, body extent -2.25,-1.55 2.25,1.55, height 1.2
USB_MICROB [mm] "FCI 10118193"
  rect 0.4x1.35 smd mask+0.05: 1(-1.3,2.675) 2(-0.65,2.675) 3(0,2.675) 4(0.65,2.675) 5(1.3,2.675)
  round 1.905 hole 1.2 mask+0.02: PAD(-3.3,0) PAD(3.3,0)
  rect 1.6x1.4 smd: PAD(-3.2,2.45) PAD(3.2,2.45)
  rect 1.9x1.9 smd: PAD(-1.2,0) PAD(1.2,0)
  silkscreen extent -3.5,1.25 3.5,3.5, body extent -3.99,-2.54 3.99,2.89, height 2.85
XTAL_ABM10 [mm] "Crystal ABM10"
  rect 0.9x0.8 smd: 1(-0.825,-0.625) 2(0.825,-0.625) 3(0.825,0.625) 4(-0.825,0.625)
  silkscreen extent -0.08,-0.08 0.08,0.08, body extent -1.27,-1.02 1.27,1.02, height 0.5

## Part data
D2: "LED"
OSC1: "Crystal"
P1: "Micro-SD card slot"
P2: "Micro-B USB connector"
P3: "6-pins for Motorola?"
P4: "Round, flat, 10-mm diameter, 3-mm thick vibration motor"
P5: "4-pins"
P6: "24-pins"
Q1 Q3 Q4 Q5 Q6 Q7 Q8 Q9 Q10 Q11 Q12 Q14: "NMOS"
Q2 Q13 Q15: "PMOS"
SW1 SW2 SW3 SW4: "Button"
U1: "Lithium Ion Battery charger, linear"
U2 U12: "Linear voltage regulator"
U3: "SD Card Host multiplexer"
U4: "ESP32 MCU module with antenna"
U5: "16-Bit SPI I/O Expander"
U6: "USB2 hub and card reader"
U7: "IMU ACCEL/GYRO/MAG I2C/SPI 24QFN"
U8: "USB to serial converter"
U9: "Pushbutton manager with power control, voltage supervisor"
U10: "IC BAROMETER I2C"
U11: library part CAM-M8, "u-blox CAM GNSS antenna module"
U13: library part ADS1115, "16-bit ADC, 4-channel"
U14: "High/low-side bidirectional current sense with enhanced PWM rejection; fixed-gain, 20, 50, 100 or 200"
U15: "Voltage supervisor and power-on timer, dual"

## Free pads (board coordinates)
  round 1.524 hole 0.889 paste+0 mask+0.025: 0(-20.574,-48.26) 0(-20.574,-44.45) 0(-17.145,-1.143) 0(-13.335,-1.143) 0(21.844,-42.799) 0(21.844,-14.859) 0(21.844,-11.049)
  round 3.5 hole 3 paste+0 mask+0.025: M(-23.368,-71.12) M(-23.368,-4.318) M(23.368,-71.12) M(23.368,-4.318)

## Via types
v1: diameter 0.711, hole 0.33, Top Layer to Bottom Layer, tented top, 297 vias
v2: diameter 1.524, hole 0.762, Top Layer to Bottom Layer, tented top, 1 vias
v3: diameter 1, hole 0.5, Top Layer to Bottom Layer, tented top, 1 vias

## Nets (pads, with @x,y where several pads share a name; then routed paths per layer and width w, separated by ;. In a path a pad name is that pad's centre, name@x,y a point inside that pad or via, vN(x,y) a via of type N, cw(c..) or ccw(c..) an arc to the next point about the centre after c; other vN are vias at no path point)
1_VDD: C7.1 R12.1 R13.1 U3.22 U6.35 | length 20.3
  Top Layer w0.254: v1(10.033,-55.753) 10.033,-57.277 11.049,-58.293 12.827,-58.293 ; U3.22@13.236,-60.938 13.236,-59.972 12.827,-59.563 12.827,-58.293 ; v1(16.002,-54.864) 12.827,-58.039 12.827,-58.293
  Bottom Layer w0.254: U6.35@9.088,-52.542 9.616,-52.542 10.033,-52.959 v1(10.033,-55.753) ; v1(16.002,-54.864) 16.002,-54.115 C7.1@16.51,-53.607 16.725,-53.392 R13.1@18.042,-53.392 R12.1@19.058,-53.392
+3V3: C4.2 C5.1 C12.1 C21.1 C24.1 C25.2 C38.2 C45.1 C46.1 D1.K L1.1 P4.1 P6.9 P6.10 Q2.S Q13.D Q15.S R5.1 R10.1 R29.2 R33.2 U3.15 U4.2 U5.5 U5.14 U7.1 U7.8 U7.13 U7.22 U10.1 U10.4 U10.5 U11.1 U11.9 U13.8 | length 57.3
  Top Layer w0.152: U3.15@16.736,-60.938 16.736,-60.48 17.018,-60.198 17.78,-60.198 v1(20.828,-57.15)
  Top Layer w0.305: D1.K@-4.915,7.065 -4.915,5.365 P4.1@-4.465,4.915 ; C4.2@15.735,2.62 16.256,2.099 16.256,1.524 17.78,0 v1(17.78,-1.27)
  Bottom Layer w0.178: v1(-7.62,-50.292) C24.1@-7.62,-49.035 ; v1(-3.556,-29.464) -3.142,-29.05 U7.22@-1.6,-29.05 ; U7.13@1,-30.85 1,-31.48 1.27,-31.75 v1(1.778,-31.75)
  Bottom Layer w0.203: U7.1@-1,-27.65 v1(-1,-26.432) ; U7.8@1.6,-28.65 3.341,-28.65 C12.1@3.797,-28.194
  Bottom Layer w0.229: Q15.S@-22.871,-66.338 -22.871,-65.733 ; R33.2@-22.771,-65.028 -22.871,-65.128 -22.871,-65.733 ; v1(-21.844,-65.786) -22.818,-65.786 -22.871,-65.733 ; P6.9@-18.102,-25.124 -17.04,-25.124 -17.018,-25.102 -17.018,-24.638 ; P6.10@-18.102,-24.624 -18.088,-24.638 -17.018,-24.638 ; v1(-15.292,-22.912) C38.2@-15.292,-23.926 -16.56,-23.926 -17.018,-24.384 -17.018,-24.638 ; v1(-14.986,-35.814) -14.736,-36.064 U13.8@-14.736,-36.957
  Bottom Layer w0.305: R29.2@-18.042,-38.1 -18.034,-38.092 v1(-18.034,-37.084) ; v1(-14.702,-48.992) U10.5@-13.448,-48.992 ; Q13.D@-12.768,-53.462 -12.768,-52.646 v1(-12.192,-52.07) ; U10.4@-11.698,-48.992 v1(-10.698,-48.992) ; U10.1@-11.698,-45.242 v1(-10.444,-45.242) ; C21.1@-4.051,-26.797 v1(-4.051,-25.667) ; C12.1@3.797,-28.194 v1(3.797,-26.937) ; v1(11.288,-27.544) U5.5@12.752,-27.544 ; U4.2@17.716,-0.228 17.78,-0.292 v1(17.78,-1.27) ; U5.14@17.952,-24.944 17.952,-24.212 18.288,-23.876 v1(18.288,-22.86) ; v1(20.955,-54.737) C5.1@20.955,-53.48 ; R10.1@21.463,-9.009 v1(22.487,-9.009) ; Q2.S@23.4,-62.91 23.4,-61.7 R5.1@23.5,-61.6 v1(24.384,-60.716)
  Bottom Layer w0.559: C46.1@-22.86,1.3 -22.812,1.348 -22.112,1.348 -22.064,1.3 C45.1@-20.955,1.3 ; C45.1@-20.842,1.348 U11.9@-20.842,3.832 ; v1(-12.842,2.238) U11.1@-12.842,3.832
  Bottom Layer w0.635: L1.1@-8.737,-19.249 C25.2@-8.737,-17.164
  other v1: -8.737,-18.206 -21.844,1.3
+3V3_RTC: C32.2 C44.1 Q13.S U9.1 U11.8 U12.5 | length 92.4
  Top Layer w0.305: v1(-24.765,-39.751) v1(-22.733,-39.751) ; v1(-18.034,-40.259) -18.034,-40.767 -16.358,-42.443 -14.376,-42.443 v1(-14.351,-42.418)
  Bottom Layer w0.152: -13.408,-54.175 -13.408,-54.102 -13.408,-51.127 -12.954,-50.673 -8.763,-50.673 -8.509,-50.927 -8.509,-55.753 -8.362,-55.9 U9.1@-8.09,-55.9
  Bottom Layer w0.305: v1(-24.765,-39.751) -24.765,-13.462 -18.796,-7.493 -18.796,-4.826 -15.748,-1.778 -15.748,-0.318 -16.066,0 -17.78,0 -19.558,1.778 -19.558,2.35 -19.842,2.634 U11.8@-19.842,3.832 ; v1(-22.733,-39.751) -22.225,-40.259 v1(-18.034,-40.259) ; v1(-14.351,-42.418) -14.351,-44.704 -15.367,-45.72 -15.367,-53.34 -15.113,-53.594 -14.699,-53.594 C32.2@-14.31,-53.983 -14.191,-54.102 -13.408,-54.102 -12.028,-54.102 Q13.S@-11.788,-53.862 ; U12.5@-13.408,-55.796 -13.408,-54.175
+3V3_USB: C3.1 C8.1 C10.1 C13.1 C16.1 C18.1 C22.2 Q8.G Q9.G Q10.G Q11.G R14.1 R18.2 R25.1 U2.5 U6.5 U6.12 U6.16 U6.25 U6.34 U6.38 U6.41 U6.48 U8.3 U8.13 U8.14 U8.15 | length 110.1
  Top Layer w0.229: v1(-0.254,-46.482) v1(1.651,-46.482) ; v1(2.54,-55.626) v1(7.239,-55.626) ; v1(10.668,-46.482) v1(10.668,-43.815)
  Top Layer w0.305: U2.5@7.442,-64.274 8.957,-64.274 C3.1@9.036,-64.195 v1(9.036,-60.217)
  Bottom Layer w0.152: Q10.G@-9.448,-36.195 -9.905,-36.195 ; Q9.G@-9.416,-38.005 -9.905,-37.516 -9.905,-36.195 ; Q11.G@-9.416,-34.449 -9.448,-34.417 -9.905,-34.417 ; R25.1@-8.128,-32.571 -8.196,-32.639 Q8.G@-9.398,-32.639 -9.779,-32.639 -9.89,-32.75 -9.89,-33.313 -9.905,-33.328 -9.905,-34.417 ; -9.905,-36.195 -9.905,-34.417
  Bottom Layer w0.178: C16.1@2.159,-43.701 2.159,-43.688 2.921,-42.926 4.432,-42.926 C13.1@5.207,-43.701
  Bottom Layer w0.229: v1(-0.254,-46.482) -0.254,-54.089 C18.1@0.013,-54.356 0.394,-54.737 2.54,-54.737 ; v1(1.651,-46.482) 1.27,-46.482 ; U6.5@2.088,-51.042 1.639,-51.042 1.421,-50.824 1.421,-47.562 1.441,-47.542 ; U6.12@2.088,-47.542 1.441,-47.542 ; C16.1@2.159,-43.701 1.27,-44.59 1.27,-46.482 ; v1(2.54,-55.626) 2.54,-54.737 ; U6.48@2.838,-53.792 2.838,-54.439 2.54,-54.737 ; U6.16@4.338,-46.792 4.338,-45.446 4.953,-44.831 4.953,-43.955 C13.1@5.207,-43.701 5.482,-43.426 R18.2@6.731,-43.426 10.279,-43.426 v1(10.668,-43.815) ; U6.41@6.338,-53.792 6.338,-54.471 7.874,-56.007 C10.1@7.874,-58.661 8.268,-59.055 8.771,-59.055 R14.1@9.144,-59.428 9.39,-59.182 9.779,-59.182 9.906,-59.055 9.906,-56.642 ; U6.38@7.838,-53.792 7.838,-54.574 9.906,-56.642 ; U6.34@9.088,-52.042 10.005,-52.042 10.795,-52.832 10.795,-56.134 10.287,-56.642 9.906,-56.642 ; U6.25@9.088,-47.542 10.357,-47.542 C8.1@10.668,-47.231 v1(10.668,-46.482) ; 1.27,-46.482 1.27,-47.371 1.441,-47.542
  Bottom Layer w0.254: Q11.G@-9.416,-34.449 -8.223,-34.449 -8.001,-34.671 -6.223,-34.671 -5.651,-35.242 U8.3@-5.651,-36.188 -5.651,-37.401 -3.937,-39.116 -3.937,-40.513 -3.746,-40.703 U8.15@-3.746,-41.638 -3.746,-42.989 -3.81,-43.053 ; C22.2@-6.591,-44.45 -5.194,-43.053 -3.81,-43.053 ; U8.14@-3.111,-41.638 -3.111,-43.021 -3.143,-43.053 ; C16.1@2.159,-43.688 2.159,-43.307 0.889,-43.307 -0.635,-41.783 -0.635,-40.64 -0.889,-40.386 -2.159,-40.386 -2.476,-40.703 U8.13@-2.476,-41.638 -2.476,-43.053 -3.143,-43.053 ; -3.81,-43.053 -3.143,-43.053
  Bottom Layer w0.305: v1(9.036,-60.217) 9.036,-59.536 R14.1@9.144,-59.428
+VBAT: C31.2 C42.2 P3.1 R23.2 R28.1 U1.3 U12.1 U12.3 | length 35.6
  Top Layer w0.254: v1(-10.541,-58.928) -9.271,-58.928 -8.636,-59.563 -8.636,-61.849 -8.951,-62.164 U1.3@-9.709,-62.164 ; v1(-5.461,-56.769) v1(-4.318,-57.912)
  Bottom Layer w0.254: U12.1@-13.408,-58.196 -11.273,-58.196 -9.652,-59.817 -6.223,-59.817 v1(-4.318,-57.912) ; v1(-5.461,-56.769) -5.461,-54.503 R23.2@-4.912,-53.954
  Bottom Layer w0.508: -14.32,-61.678 -14.414,-61.584 R28.1@-16.398,-61.584 C42.2@-16.398,-60.06 -15.308,-58.97 U12.3@-15.308,-58.196 -15.308,-57.345 -15.294,-57.331 -13.408,-57.331 U12.1@-13.408,-58.196
  Bottom Layer w1.016: P3.1@-14.32,-66.005 P3.1@-14.32,-63.355 -14.32,-61.678 C31.2@-13.729,-61.087
GDR: P6.23 Q12.G R27.1 | length 7.7
  Bottom Layer w0.279: P6.23@-18.102,-18.124 -15.332,-18.124 R27.1@-15.292,-18.084 -15.292,-17.832 -14.732,-17.272 -13.716,-17.272 -11.938,-19.05 -11.938,-19.338 Q12.G@-11.927,-19.349
GND: C1.1 C2.2 C3.2 C4.1 C5.2 C6.2 C7.2 C8.2 C9.2 C10.2 C11.2 C12.2 C13.2 C14.2 C15.2 C16.2 C17.1 C18.2 C19.2 C20.1 C21.2 C22.1 C23.1 C24.2 C25.1 C27.2 C28.1 C29.1 C30.1 C31.1 C32.1 C33.1 C34.1 C35.1 C36.1 C37.1 C38.1 C39.1 C40.1 C42.1 C43.1 C44.2 C45.2 C46.2 D6.K OSC1.2 OSC1.4 P1.6 P1.G1 P1.G2 P1.G3 P1.G4 P1.M P2.5 P2.PAD P5.4 P6.8 P6.17 Q1.S Q4.S R1.2 R4.2 R9.1 R11.1 R19.2 R20.1 R21.1 R22.1 R26.2 R27.2 R31.2 SW1.1 SW2.2 SW3.2 SW4.2 U1.2 U2.2 U3.7 U3.PAD U4.1 U4.15 U4.38 U4.PAD U5.6 U5.11 U5.12 U5.13 U5.PAD U6.13 U6.40 U6.PAD U7.9 U7.11 U7.18 U7.20 U8.6 U8.16 U9.12 U10.3 U11.4 U11.5 U11.10 U11.11 U11.12 U11.13 U11.14 U11.15 U11.18 U11.19 U11.21 U11.22 U11.27 U11.31 U12.2 U13.1 U13.3 U14.3 U14.4 U14.6 | length 207.2
  Top Layer w0.203: U3.PAD@14.986,-62.738 15.236,-62.988 U3.7@15.236,-64.538 ; v1(16.51,-50.8) 16.764,-51.054 16.764,-51.308 17.14,-51.684 SW4.2@17.14,-52.57
  Top Layer w0.254: v1(-17.14,-53.716) SW1.1@-17.14,-52.57 ; v1(-11.176,-61.722) -10.668,-61.214 U1.2@-9.709,-61.214 ; v1(-3.388,-50.46) -1.9,-51.948 SW2.2@-1.9,-52.57 ; v1(-2.654,-45.834) -1.9,-45.08 SW3.2@-1.9,-44.323
  Top Layer w0.305: R1.2@-9.525,8.47 -9.425,8.57 -8.89,8.57 ; v1(-8.89,7.62) -8.89,8.57 ; Q1.S@-8.11,8.57 -8.89,8.57 ; R4.2@-5.588,-60.333 -4.085,-60.333 C1.1@-3.937,-60.185 ; v1(3.448,-63.1) C2.2@3.448,-64.195 4.043,-64.791 4.339,-64.791 4.772,-65.224 U2.2@5.042,-65.224 ; v1(9.036,-66.948) C3.2@9.036,-65.745 ; C4.1@17.285,2.62 18.986,0.919 v1(18.986,-1.206)
  Bottom Layer w0.152: R31.2@-20.066,-60.071 -20.828,-59.309 -20.828,-53.34 -20.574,-53.086 -18.288,-53.086 ; U14.4@-18.333,-51.282 -18.333,-53.041 -18.288,-53.086 ; U14.3@-17.683,-51.282 -17.683,-52.735 -18.034,-53.086 -18.288,-53.086 ; U7.20@-1.6,-29.85 -2.672,-29.85 v1(-2.794,-29.972) -1.916,-30.85 U7.18@-1,-30.85
  Bottom Layer w0.178: v1(-15.24,-39.37) -15.24,-38.231 U13.3@-15.236,-38.227 ; U13.1@-14.236,-38.227 -14.236,-38.723 -13.97,-38.989 v1(-13.97,-39.624) ; U7.11@1.6,-29.85 2.164,-29.85 3.111,-30.797 4.508,-30.797 5.334,-29.972 C11.2@5.347,-29.972 5.347,-29.906 4.491,-29.05 ; U7.9@1.6,-29.05 4.491,-29.05 ; C12.2@5.347,-28.194 4.491,-29.05
  Bottom Layer w0.203: U6.13@2.838,-46.792 2.838,-47.542 v1(5.588,-50.292) 6.838,-51.542 U6.40@6.838,-53.792 ; v1(10.668,-50.038) C8.2@10.668,-48.781 ; v1(16.51,-66.548) 16.687,-66.725 P1.6@16.687,-68.388 ; C7.2@16.51,-52.057 v1(16.51,-50.8) ; Q4.S@19.454,-48.994 19.454,-47.656 R11.1@19.296,-47.498 v1(20.32,-47.498) ; C5.2@20.955,-51.93 v1(20.955,-50.673) ; R9.1@23.114,-56.142 v1(23.114,-55.372)
  Bottom Layer w0.229: P6.8@-18.102,-25.624 -16.988,-25.624 -16.256,-24.892 v1(-16.256,-24.638)
  Bottom Layer w0.254: P6.17@-18.102,-21.124 v1(-16.933,-21.124) ; U12.2@-14.358,-58.196 -14.224,-58.33 -14.224,-59.182 -13.716,-59.69 -12.7,-59.69 -12.446,-59.944 -12.446,-60.82 C31.1@-12.179,-61.087 -11.544,-61.722 v1(-11.176,-61.722) ; C32.1@-14.31,-52.433 -14.224,-52.347 v1(-14.224,-51.308) ; U10.3@-11.698,-47.742 v1(-10.564,-47.742) C27.2@-9.271,-49.035 ; v1(-10.16,-55.118) -10.16,-55.626 -9.886,-55.9 U9.12@-9.69,-55.9 ; C22.1@-8.141,-44.45 -8.128,-44.437 v1(-8.128,-43.434) ; C24.2@-7.62,-47.485 -7.379,-47.244 -6.604,-47.244 v1(-6.35,-47.498) ; v1(-6.792,-7.3) R22.1@-6.792,-5.842 ; v1(-4.826,-40.132) -4.381,-40.576 U8.16@-4.381,-41.638 ; v1(-3.388,-50.46) R21.1@-3.388,-49.644 R20.1@-2.372,-49.644 ; C20.1@-2.654,-47.117 v1(-2.654,-45.834) ; P2.5@-1.3,-71.493 v1(-1.3,-69.626) ; C9.2@7.887,-72.898 v1(8.89,-72.898) ; v1(18.986,16.574) U4.38@18.986,17.872
  Bottom Layer w0.305: U11.13@-24.992,3.832 -24.992,2.704 -24.892,2.604 -24.13,2.604 ; U11.14@-24.992,13.432 -24.892,13.532 -24.892,14.986 -23.842,14.986 U11.15@-23.842,13.432 ; v1(-24.13,1.524) -24.13,2.604 ; U11.12@-23.842,3.832 -23.842,2.604 ; v1(-22.86,-1.46) C46.2@-22.86,-0.25 ; -22.842,2.622 U11.11@-22.842,3.832 ; U11.10@-21.842,3.832 -21.842,2.606 -21.844,2.604 -23.842,2.604 ; v1(-20.955,-1.587) C45.2@-20.955,-0.25 ; U11.18@-20.842,13.432 -20.842,14.972 -20.828,14.986 -19.842,14.986 U11.19@-19.842,13.432 ; v1(-19.436,-43.302) C43.1@-18.133,-43.302 -17.683,-43.752 U14.6@-17.683,-45.482 ; v1(-19.05,-1.524) C44.2@-19.05,-0.25 ; U11.21@-17.842,13.432 -17.842,14.986 -16.764,14.986 -16.764,13.51 U11.22@-16.842,13.432 -16.842,12.588 -16.256,12.002 -11.43,12.002 v1(-11.176,11.748) -11.176,10.986 -11.53,10.632 U11.27@-12.092,10.632 ; U11.5@-16.842,3.832 -16.842,2.682 -16.51,2.35 v1(-15.748,2.35) -15.748,3.738 U11.4@-15.842,3.832 ; C33.1@-14.232,-29.972 v1(-13.716,-29.972) ; C34.1@-14.232,-28.448 v1(-13.462,-28.448) ; v1(-3.746,-37.782) U8.6@-3.746,-36.188 ; R19.2@-2.032,-59.936 -1.757,-60.211 C19.2@-0.762,-60.211 ; v1(-1.537,-55.613) C18.2@-1.537,-54.356 ; v1(-0.762,-61.214) C19.2@-0.762,-60.211 ; C17.1@0.508,-59.936 0.233,-60.211 C19.2@-0.762,-60.211 ; U4.15@0.916,3.112 0.98,3.048 v1(2.032,3.048) ; v1(1.715,-61.151) OSC1.4@1.715,-60.061 ; C16.2@2.159,-42.151 C15.2@3.683,-42.151 C13.2@5.207,-42.151 v1(6.096,-41.262) ; v1(3.81,-57.658) 3.81,-58.366 OSC1.2@3.365,-58.811 3.49,-58.936 C14.2@4.572,-58.936 ; C11.2@5.347,-29.972 v1(6.604,-29.972) ; C10.2@7.874,-60.211 9.337,-61.674 P1.G2@9.337,-61.827 P1.G1@9.337,-64.437 8.382,-65.392 8.382,-66.294 v1(9.036,-66.948) ; P1.M@12.692,-61.152 P1.M@16.882,-61.152 ; U5.6@12.752,-26.894 14.702,-26.894 v1(16.002,-28.194) ; U5.11@16.002,-24.944 16.002,-23.622 16.637,-23.622 ; U5.12@16.652,-24.944 16.652,-23.637 16.637,-23.622 ; U5.13@17.302,-24.944 v1(17.302,-23.652) 17.272,-23.622 16.637,-23.622 ; v1(18.986,-1.206) U4.1@18.986,-0.228 ; C6.2@19.558,-6.765 v1(19.558,-5.588) ; -24.13,2.604 -23.842,2.604
  Bottom Layer w0.381: C30.1@-11.277,-26.049 v1(-11.277,-25.247) ; C29.1@-10.777,-24.009 v1(-10.027,-24.009) ; D6.K@-8.737,-27.349 -8.566,-27.178 v1(-7.62,-27.178) ; C21.2@-5.601,-26.797 v1(-5.601,-25.667)
  Bottom Layer w0.635: v1(-20.079,-61.328) R31.2@-20.079,-60.06 R31.2@-20.066,-60.073 ; C35.1@-14.292,-26.974 C36.1@-14.292,-25.958 C37.1@-14.292,-24.942 C38.1@-14.292,-23.926 ; v1(-14.292,-21.268) C39.1@-14.292,-20.116 C40.1@-14.292,-19.1 R27.2@-14.292,-18.084 ; R26.2@-10.642,-15.614 C25.1@-8.737,-15.614 ; P2.PAD@-3.2,-71.718 -3.2,-74.068 P2.PAD@-3.3,-74.168 P2.PAD@-1.2,-74.168 P2.PAD@1.2,-74.168 P2.PAD@3.3,-74.168 3.3,-71.818 P2.PAD@3.2,-71.718
  other v1: 17.018,-72.39 20.066,-64.516 14.486,-62.738 15.486,-62.738 20.066,-62.738 9.906,-61.468 17.78,-60.96 -4.837,-60.333 -18.034,-59.69 -13.208,-59.69 -22.86,-53.594 -9.652,-51.562 -7.366,-51.562 -25.654,-44.196 19.558,-38.354 -22.098,-37.338 -14.292,-26.466 -14.292,-24.384 -9.689,-15.614 24.638,-9.906 0.254,-7.874 11.684,-6.858 4.572,-3.81 8.128,-2.794 7.366,2.032 -1.778,5.842 4.826,5.842 -11.176,6.668 2.794,14.224 -24.384,14.986 -20.335,14.986 -17.303,14.986
  other v2: 12.7,8.89
  other v3: 11.566,8.122
GPIO0: Q5.S U4.25 | length 45.6
  Bottom Layer w0.152: U4.25@2.476,17.872 2.794,18.19 2.794,18.288 3.048,18.542 19.558,18.542 19.812,18.288 19.812,-1.524 18.288,-3.048 17.526,-3.048 15.748,-4.826 15.748,-6.35 16.158,-6.76 Q5.S@16.618,-6.76
HLT_CTL: P6.24
I2C_SCL: U4.10 U7.23 U10.8 U13.10 | length 66
  Top Layer w0.152: v1(-13.589,-35.433) -13.589,-31.877 -12.065,-30.353 v1(-12.065,-29.591)
  Top Layer w0.178: v1(6.604,-18.796) v1(6.604,-13.97)
  Bottom Layer w0.152: U13.10@-14.126,-37.592 -13.335,-37.592 ; v1(-13.589,-35.433) -13.589,-35.877 -12.878,-36.588 -12.878,-37.389 -13.081,-37.592 -13.335,-37.592 ; U10.8@-13.448,-45.242 -13.284,-45.078 -13.284,-37.643 -13.335,-37.592 ; v1(-12.065,-29.591) -11.124,-28.65 -2.667,-28.65 ; U7.23@-1.6,-28.65 -2.667,-28.65 ; v1(6.604,-18.796) 6.604,-24.384 6.096,-24.892 -1.905,-24.892 -2.667,-25.654 -2.667,-28.65
  Bottom Layer w0.178: v1(6.604,-13.97) 6.604,-1.778 7.556,-0.826 U4.10@7.556,-0.228